# Altium PCB CPU_Board_Updated.PcbDoc
Units mil, origin at the board's own origin, x right, y up, seen from the top; angles counter-clockwise.
Board outline 6000 x 4000 mil, 2 copper layers (Top Layer, Bottom Layer); 101 components, 87 nets, 622 pads, 38 vias.
Unrouted connection lines stored in the file: 149.
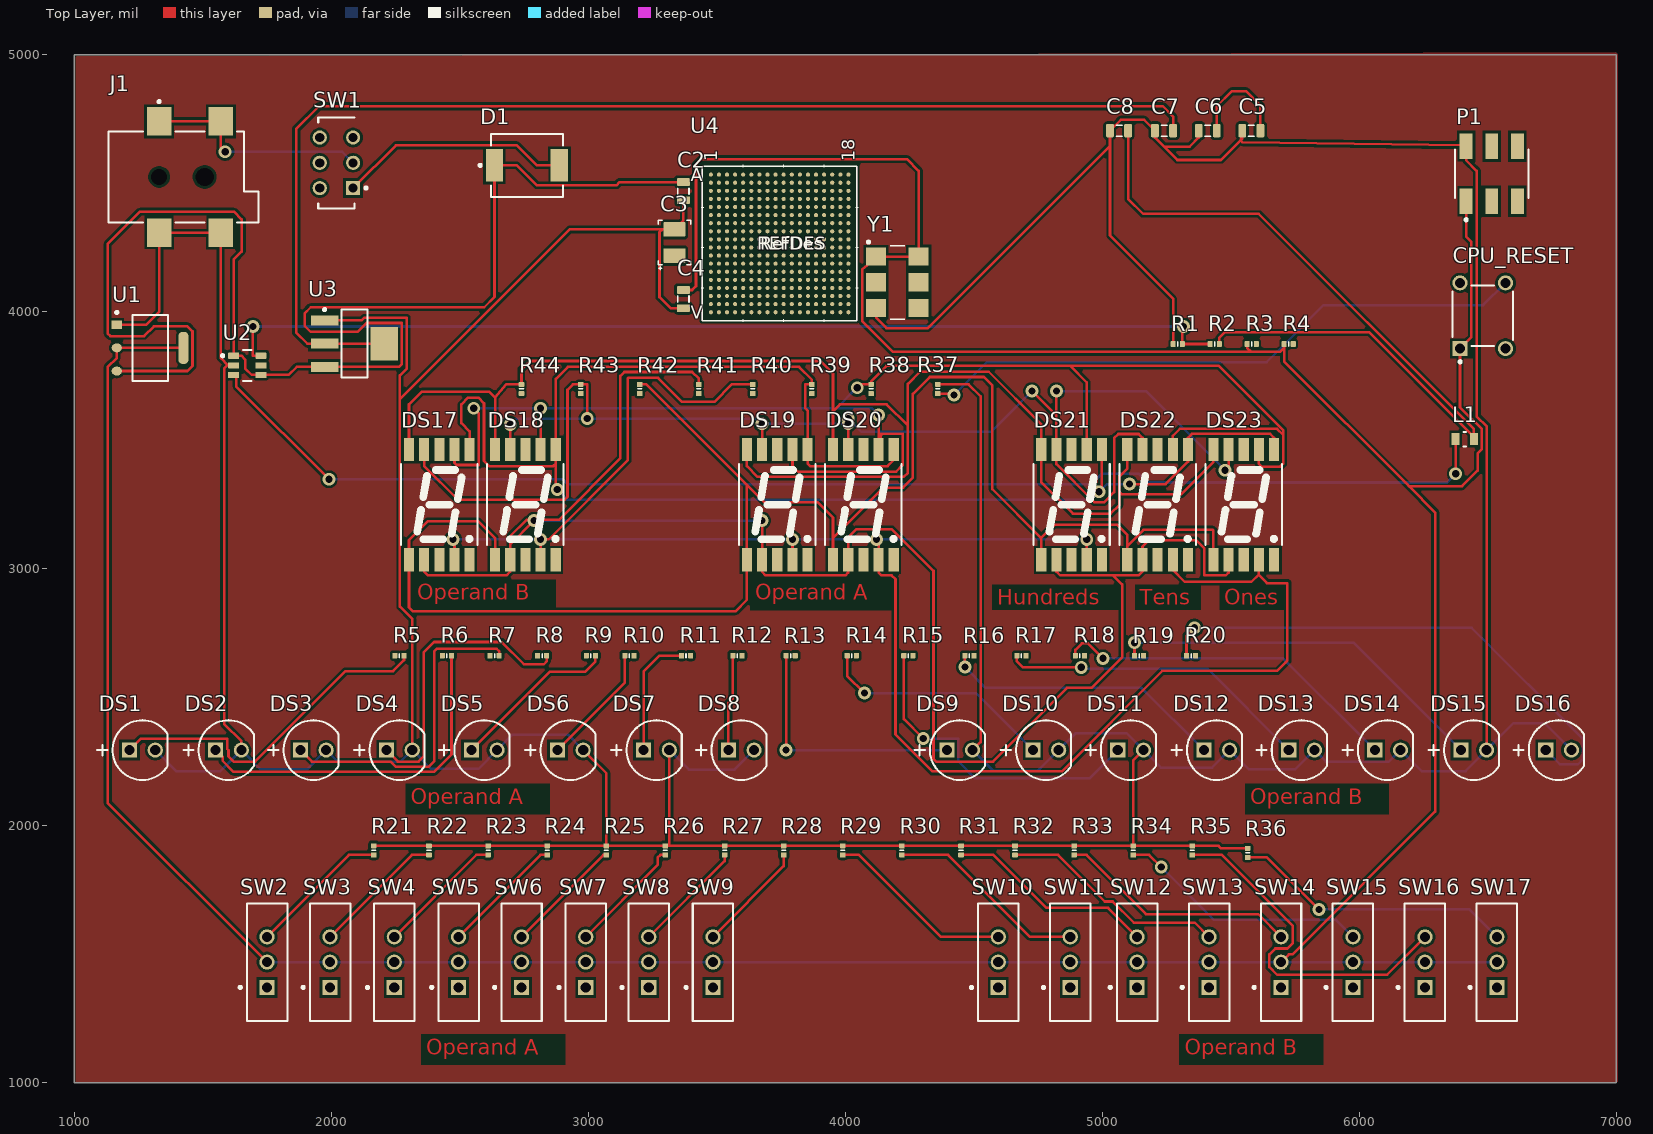
[diagram p0: Top Layer view]
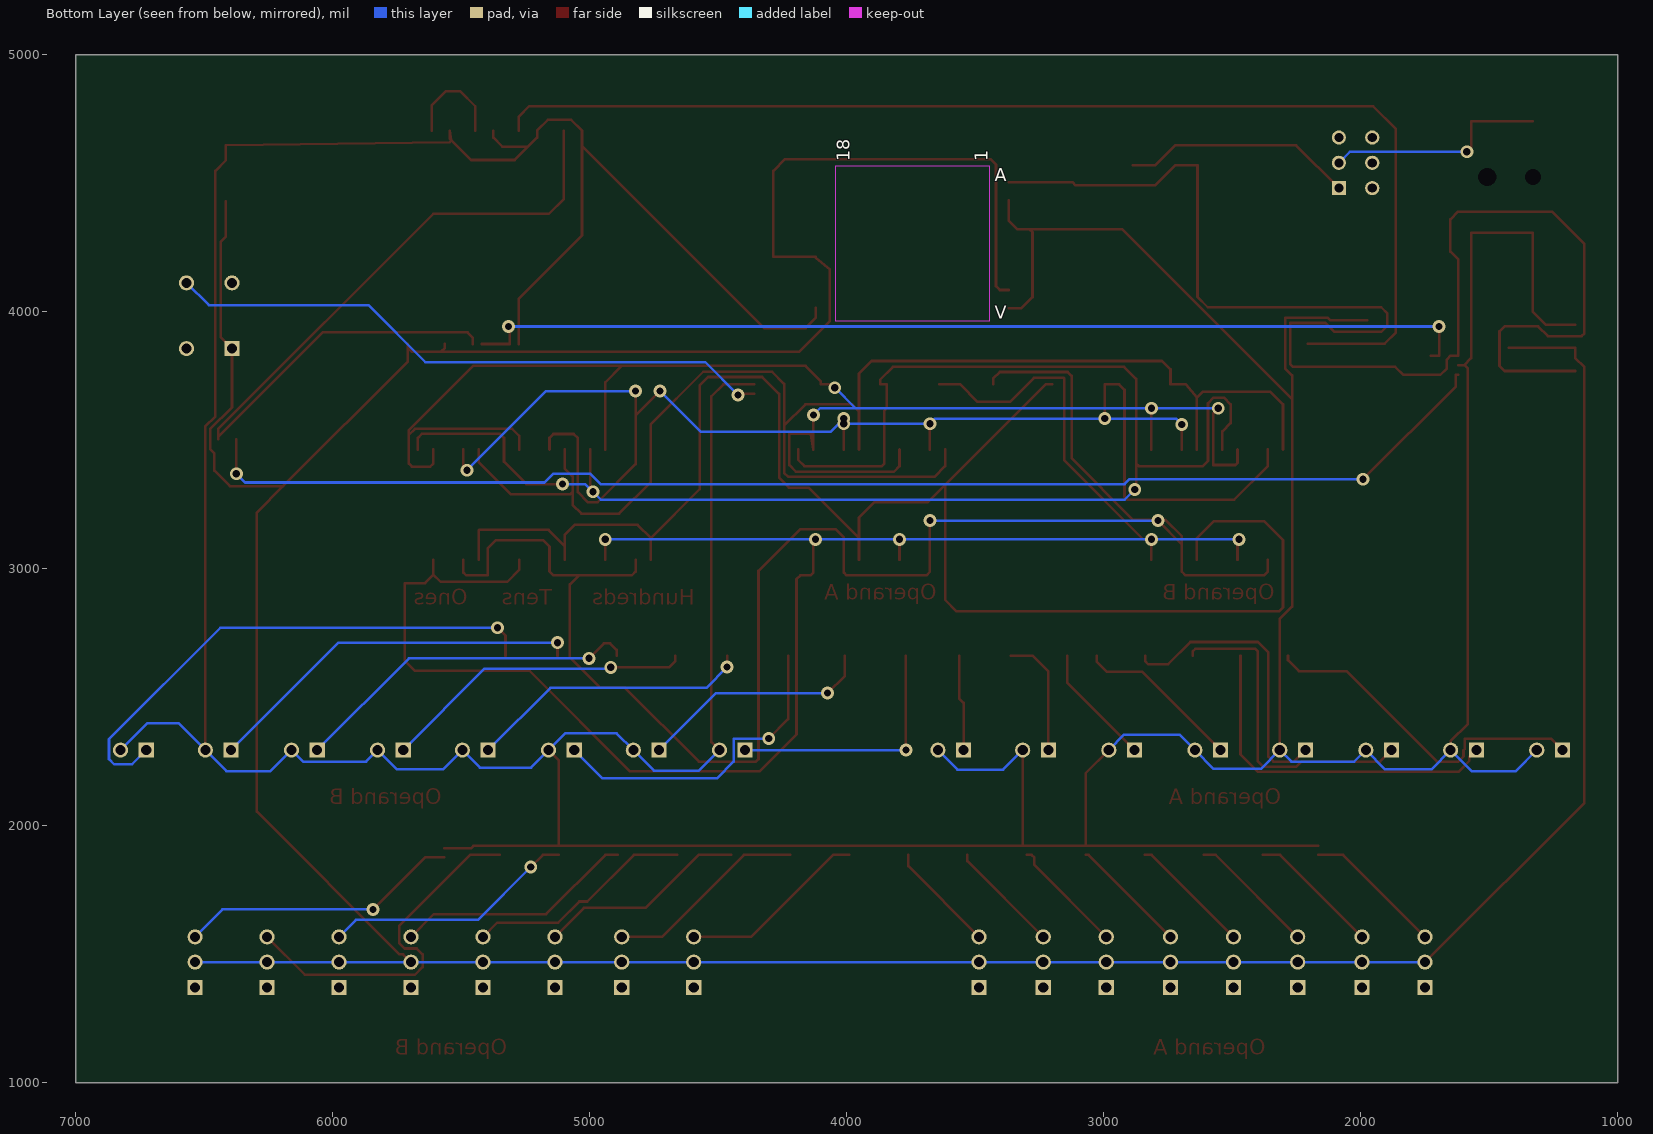
[diagram p1: Bottom Layer view, seen from below]

## Layer stack, top to bottom
Top Solder: solder mask 0.4, Solder Resist, Dk 3.5
Top Layer: signal copper 1.4
Dielectric 1: dielectric 12.6, FR-4, Dk 4.8
Bottom Layer: signal copper 1.4
Bottom Solder: solder mask 0.4, Solder Resist, Dk 3.5

## Board outline
1000,1000 7000,1000 7000,5000 1000,5000

## Design rules (kind name [scope] priority, off if disabled: settings)
Clearance [All] p1: gap=10 ignorepadtopadclearanceinfootprint=FALSE
PolygonConnect [All] p1: connectstyle=Relief reliefconductorwidth=10 reliefentries=4 polygonreliefangle="90 Angle" airgapwidth=10
RoutingVias [All] p1: holewidth=28 width=50 viastyle="Through Hole" minholewidth=28 minwidth=50 maxholewidth=28 maxwidth=50
SolderMaskExpansion [All] p1: expansion=0 istentingtop=FALSE
SupplyNets "Schematic Supply Nets_4" [InNet('+3V3')] p1: voltage=0.000
SupplyNets "Schematic Supply Nets_3" [InNet('+5V')] p2: voltage=0.000
SupplyNets "Schematic Supply Nets_2" [InNet('+1V8')] p3: voltage=0.000
SupplyNets "Schematic Supply Nets_1" [InNet('GND')] p4: voltage=0.000
SupplyNets "Schematic Supply Nets" [InNet('+1V0')] p5: voltage=0.000
Width [All] p1: maxlimit=10 minlimit=10 preferedwidth=10
30 further rules are at their usual default settings.

## Classes and differential pairs
component class Power_Supply: C2 C3 C4 C5 C6 C7 C8 D1 J1 L1 R1 R2 SW1 U1 U2 U3
component class Peripherals: CPU_RESET DS1 DS2 DS3 DS4 DS5 DS6 DS7 DS8 DS9 DS10 DS11 DS12 DS13 DS14 DS15 DS16 DS17 DS18 DS19 DS20 DS21 DS22 DS23 R5 R6 R7 R8 R9 R10 R11 R12 R13 R14 R15 R16 R17 R18 R19 R20 R21 R22 R23 R24 R25 R26 R27 R28 R29 R30 R31 R32 R33 R34 R35 R36 R37 R38 R39 R40 R41 R42 R43 R44 SW2 SW3 SW4 SW5 SW6 SW7 SW8 SW9 SW10 SW11 SW12 SW13 SW14 SW15 SW16 SW17
component class FPGA_Core: P1 R3 R4 U4 Y1

## Components (designator, comment, footprint, x,y, rotation, side; value= is the part's Value field where it differs from the comment)
C2 "Capacitor 10µF +/-20% 25V 0805" CAPC0805(2012)145_L 3370,4470 r90 top value=10µF
C3 "Capacitor 6.8µF +/-20% 35V B2" PNSC-6TPE150MAZB_L 3335,4270 r90 top value=100µF
C4 "Capacitor 10µF +/-20% 25V 0805" CAPC0805(2012)145_L 3370,4050 r90 top value=22µF
C5 "Capacitor 10µF +/-20% 25V 0805" CAPC0805(2012)145_L 5580,4705 r0 top value=10µF
C6 "Capacitor 10µF +/-20% 25V 0805" CAPC0805(2012)145_L 5410,4705 r0 top value=10µF
C7 "Capacitor 10µF +/-20% 25V 0805" CAPC0805(2012)145_L 5240,4705 r0 top value=22µF
C8 "Capacitor 10µF +/-20% 25V 0805" CAPC0805(2012)145_L 5065,4705 r0 top value=10µF
CPU_RESET "B3F-1000" OMRON-B3F-1000-4_V 6480,3985 r90 top
D1 "SS34-E3/9AT" FP-SMC-MFG 2761.18,4570 r0 top
DS1 "UR502DC" CGX-UR502DC 1265,2295 r0 top
DS2 "UR502DC" CGX-UR502DC 1600,2295 r0 top
DS3 "UR502DC" CGX-UR502DC 1930,2295 r0 top
DS4 "UR502DC" CGX-UR502DC 2265,2295 r0 top
DS5 "UR502DC" CGX-UR502DC 2595,2295 r0 top
DS6 "UR502DC" CGX-UR502DC 2930,2295 r0 top
DS7 "UR502DC" CGX-UR502DC 3265,2295 r0 top
DS8 "UR502DC" CGX-UR502DC 3595,2295 r0 top
DS9 "UR502DC" CGX-UR502DC 4445,2295 r0 top
DS10 "UR502DC" CGX-UR502DC 4780,2295 r0 top
DS11 "UR502DC" CGX-UR502DC 5110,2295 r0 top
DS12 "UR502DC" CGX-UR502DC 5445,2295 r0 top
DS13 "UR502DC" CGX-UR502DC 5775,2295 r0 top
DS14 "UR502DC" CGX-UR502DC 6110,2295 r0 top
DS15 "UR502DC" CGX-UR502DC 6445,2295 r0 top
DS16 "UR502DC" CGX-UR502DC 6775,2295 r0 top
DS17 "157112S12800" WL-S7DS_L12W7.3H3.75 2420.24,3250 r0 top
DS18 "157112S12800" WL-S7DS_L12W7.3H3.75 2755.2,3250 r0 top
DS19 "157112S12800" WL-S7DS_L12W7.3H3.75 3735.16,3250 r0 top
DS20 "157112S12800" WL-S7DS_L12W7.3H3.75 4070.12,3250 r0 top
DS21 "157112S12800" WL-S7DS_L12W7.3H3.75 4880.08,3250 r0 top
DS22 "157112S12800" WL-S7DS_L12W7.3H3.75 5215.04,3250 r0 top
DS23 "157112S12800" WL-S7DS_L12W7.3H3.75 5550,3250 r0 top
J1 "PJ-002AH-SMT-TR" CUI-PJ-002AH-4_V 1424.49,4525 r0 top
L1 "MLZ2012A2R2WTD25" FP-MLZ2012-0_85-MFG 6410,3505 r0 top
P1 "95278-101A06LF" AMPM-95278-101A06LF_V 6515,4537.48 r0 top
R1 "Resistor 100K +/-1 % 0402 63 mW" RESC0402(1005)_L 5293.31,3875 r0 top value=150k
R2 "Resistor 100K +/-1 % 0402 63 mW" RESC0402(1005)_L 5437.2,3875 r0 top value=100k
R3 "10KR2F" RESC0402(1005)_L 5581.1,3875 r0 top value=10k
R4 "10KR2F" RESC0402(1005)_L 5725,3875 r0 top value=10k
R5 "Resistor 330R +/-5 % 0402 63 mW" RESC0402(1005)_L 2265,2662.72 r0 top value=330
R6 "Resistor 330R +/-5 % 0402 63 mW" RESC0402(1005)_L 2450,2662.72 r0 top value=330
R7 "Resistor 330R +/-5 % 0402 63 mW" RESC0402(1005)_L 2635,2662.72 r0 top value=330
R8 "Resistor 330R +/-5 % 0402 63 mW" RESC0402(1005)_L 2820,2662.72 r0 top value=330
R9 "Resistor 330R +/-5 % 0402 63 mW" RESC0402(1005)_L 3010,2662.72 r0 top value=330
R10 "Resistor 330R +/-5 % 0402 63 mW" RESC0402(1005)_L 3160,2662.72 r180 top value=330
R11 "Resistor 330R +/-5 % 0402 63 mW" RESC0402(1005)_L 3380,2662.72 r180 top value=330
R12 "Resistor 330R +/-5 % 0402 63 mW" RESC0402(1005)_L 3580,2662.72 r180 top value=330
R13 "Resistor 330R +/-5 % 0402 63 mW" RESC0402(1005)_L 3787.28,2662.72 r180 top value=330
R14 "Resistor 330R +/-5 % 0402 63 mW" RESC0402(1005)_L 4025,2662.72 r180 top value=330
R15 "Resistor 330R +/-5 % 0402 63 mW" RESC0402(1005)_L 4245,2662.72 r180 top value=330
R16 "Resistor 330R +/-5 % 0402 63 mW" RESC0402(1005)_L 4482.72,2662.72 r180 top value=330
R17 "Resistor 330R +/-5 % 0402 63 mW" RESC0402(1005)_L 4685,2662.72 r180 top value=330
R18 "Resistor 330R +/-5 % 0402 63 mW" RESC0402(1005)_L 4912.72,2662.72 r180 top value=330
R19 "Resistor 330R +/-5 % 0402 63 mW" RESC0402(1005)_L 5142.72,2662.72 r180 top value=330
R20 "Resistor 330R +/-5 % 0402 63 mW" RESC0402(1005)_L 5345,2662.72 r180 top value=330
R21 "10KR2F" RESC0402(1005)_L 2165,1905 r90 top value=10k
R22 "10KR2F" RESC0402(1005)_L 2380,1905 r90 top value=10k
R23 "10KR2F" RESC0402(1005)_L 2610,1905 r90 top value=10k
R24 "10KR2F" RESC0402(1005)_L 2840,1905 r90 top value=10k
R25 "10KR2F" RESC0402(1005)_L 3070,1905 r90 top value=10k
R26 "10KR2F" RESC0402(1005)_L 3300,1905 r90 top value=10k
R27 "10KR2F" RESC0402(1005)_L 3530,1905 r90 top value=10k
R28 "10KR2F" RESC0402(1005)_L 3760,1905 r90 top value=10k
R29 "10KR2F" RESC0402(1005)_L 3990,1905 r90 top value=10k
R30 "10KR2F" RESC0402(1005)_L 4220,1905 r90 top value=10k
R31 "10KR2F" RESC0402(1005)_L 4450,1905 r90 top value=10k
R32 "10KR2F" RESC0402(1005)_L 4660,1905 r90 top value=10k
R33 "10KR2F" RESC0402(1005)_L 4890,1905 r90 top value=10k
R34 "10KR2F" RESC0402(1005)_L 5120,1905 r90 top value=10k
R35 "10KR2F" RESC0402(1005)_L 5350,1905 r90 top value=10k
R36 "10KR2F" RESC0402(1005)_L 5565,1895 r90 top value=10k
R37 "10KR2F" RESC0402(1005)_L 4360,3700 r90 top value=10k
R38 "Resistor 330R +/-5 % 0402 63 mW" RESC0402(1005)_L 4100,3700 r90 top value=330
R39 "Resistor 330R +/-5 % 0402 63 mW" RESC0402(1005)_L 3870,3700 r90 top value=330
R40 "Resistor 330R +/-5 % 0402 63 mW" RESC0402(1005)_L 3640,3700 r90 top value=330
R41 "Resistor 330R +/-5 % 0402 63 mW" RESC0402(1005)_L 3430,3700 r90 top value=330
R42 "Resistor 330R +/-5 % 0402 63 mW" RESC0402(1005)_L 3200,3700 r90 top value=330
R43 "Resistor 330R +/-5 % 0402 63 mW" RESC0402(1005)_L 2970,3700 r90 top value=330
R44 "Resistor 330R +/-5 % 0402 63 mW" RESC0402(1005)_L 2740,3700 r90 top value=330
SW1 "JS202011CQN" FP-JS202011CQN-MFG 2020,4580 r90 top
SW2 "EG1218" ESWI-EG1218_V 1750,1470 r90 top
SW3 "EG1218" ESWI-EG1218_V 1995,1470 r90 top
SW4 "EG1218" ESWI-EG1218_V 2245,1470 r90 top
SW5 "EG1218" ESWI-EG1218_V 2495,1470 r90 top
SW6 "EG1218" ESWI-EG1218_V 2740,1470 r90 top
SW7 "EG1218" ESWI-EG1218_V 2990,1470 r90 top
SW8 "EG1218" ESWI-EG1218_V 3235,1470 r90 top
SW9 "EG1218" ESWI-EG1218_V 3485,1470 r90 top
SW10 "EG1218" ESWI-EG1218_V 4595,1470 r90 top
SW11 "EG1218" ESWI-EG1218_V 4875,1470 r90 top
SW12 "EG1218" ESWI-EG1218_V 5135,1470 r90 top
SW13 "EG1218" ESWI-EG1218_V 5415,1470 r90 top
SW14 "EG1218" ESWI-EG1218_V 5695,1470 r90 top
SW15 "EG1218" ESWI-EG1218_V 5975,1470 r90 top
SW16 "EG1218" ESWI-EG1218_V 6255,1470 r90 top
SW17 "EG1218" ESWI-EG1218_V 6535,1470 r90 top
U1 "AMS1117-3.3" FP-AMS1117-IPC_C 1295,3860 r0 top
U2 "TLV62568PDDCT" FP-DDC0006A-MFG 1673.15,3791.99 r0 top
U3 "LD1117S18TR" SOT-223_M 2090,3876.63 r0 top
U4 "XC7A100T-1CSG324C" CSG324_XIL 3744.25,4266.26 r0 top
Y1 "XLH735100.000000X" JU6_MFG 4202.32,4115 r0 top

## Footprints (in the part's own frame and the unit in brackets; to place one, negate y for a bottom-side part, rotate by r counter-clockwise, add the part's x,y. Pads: shape width x height; smd on the part's side, far side on the other; paste and mask are expansions set on the pad)
AMPM-95278-101A06LF_V [mm] "SMD, 6-Leads, Body 7.26x4.83mm, Pitch 2.54mm"
  rect 1.27x2.54 smd: 1(-2.54,-2.73) 2(-2.54,2.73) 3(0,-2.73) 4(0,2.73) 5(2.54,-2.73) 6(2.54,2.73)
  silkscreen extent -3.63,-4.67 3.63,2.42, body extent -3.61,-3.64 3.61,3.64, height 9.71
CAPC0805(2012)145_L [mm] "Chip Capacitor, Body 2.0x1.2mm, Height 1.45mm, IPC High Density"
  rrect25% 0.76x1.3 smd: 1(-0.9,0) 2(0.89,0)
  silkscreen extent -0.3,-0.55 0.3,0.55, body extent -1,-0.6 1,0.6, height 1.45
CGX-UR502DC [mm] "THD, 2-Leads, Dia 5.9mm, Pin Spacing 2.54mm"
  rect 1.5x1.5 hole 1: 1(-1.27,0)
  round 1.5 hole 1: 2(1.27,0)
  silkscreen extent -4.47,-2.95 2.5,2.95, body extent -2.95,-2.95 2.5,2.95, height 9.1
CSG324_XIL [mil]
  round 16 smd paste+0 mask+0: A1(-267.72,267.72) A2(-236.22,267.72) A3(-204.72,267.72) A4(-173.23,267.72) A5(-141.73,267.72) A6(-110.24,267.72) A7(-78.74,267.72) A8(-47.24,267.72) A9(-15.75,267.72) A10(15.75,267.72) A11(47.24,267.72) A12(78.74,267.72) A13(110.24,267.72) A14(141.73,267.72) A15(173.23,267.72) A16(204.72,267.72) A17(236.22,267.72) A18(267.72,267.72) B1(-267.72,236.22) B2(-236.22,236.22) B3(-204.72,236.22) B4(-173.23,236.22) B5(-141.73,236.22) B6(-110.24,236.22) B7(-78.74,236.22) B8(-47.24,236.22) B9(-15.75,236.22) B10(15.75,236.22) B11(47.24,236.22) B12(78.74,236.22) B13(110.24,236.22) B14(141.73,236.22) B15(173.23,236.22) B16(204.72,236.22) B17(236.22,236.22) B18(267.72,236.22) C1(-267.72,204.72) C2(-236.22,204.72) C3(-204.72,204.72) C4(-173.23,204.72) C5(-141.73,204.72) C6(-110.24,204.72) C7(-78.74,204.72) C8(-47.24,204.72) C9(-15.75,204.72) C10(15.75,204.72) C11(47.24,204.72) C12(78.74,204.72) C13(110.24,204.72) C14(141.73,204.72) C15(173.23,204.72) C16(204.72,204.72) C17(236.22,204.72) C18(267.72,204.72) D1(-267.72,173.23) D2(-236.22,173.23) D3(-204.72,173.23) D4(-173.23,173.23) D5(-141.73,173.23) D6(-110.24,173.23) D7(-78.74,173.23) D8(-47.24,173.23) D9(-15.75,173.23) D10(15.75,173.23) D11(47.24,173.23) D12(78.74,173.23) D13(110.24,173.23) D14(141.73,173.23) D15(173.23,173.23) D16(204.72,173.23) D17(236.22,173.23) D18(267.72,173.23) E1(-267.72,141.73) E2(-236.22,141.73) E3(-204.72,141.73) E4(-173.23,141.73) E5(-141.73,141.73) E6(-110.24,141.73) E7(-78.74,141.73) E8(-47.24,141.73) E9(-15.75,141.73) E10(15.75,141.73) E11(47.24,141.73) E12(78.74,141.73) E13(110.24,141.73) E14(141.73,141.73) E15(173.23,141.73) E16(204.72,141.73) E17(236.22,141.73) E18(267.72,141.73) F1(-267.72,110.24) F2(-236.22,110.24) F3(-204.72,110.24) F4(-173.23,110.24) F5(-141.73,110.24) F6(-110.24,110.24) F7(-78.74,110.24) F8(-47.24,110.24) F9(-15.75,110.24) F10(15.75,110.24) F11(47.24,110.24) F12(78.74,110.24) F13(110.24,110.24) F14(141.73,110.24) F15(173.23,110.24) F16(204.72,110.24) F17(236.22,110.24) F18(267.72,110.24) G1(-267.72,78.74) G2(-236.22,78.74) G3(-204.72,78.74) G4(-173.23,78.74) G5(-141.73,78.74) G6(-110.24,78.74) G7(-78.74,78.74) G8(-47.24,78.74) G9(-15.75,78.74) G10(15.75,78.74) G11(47.24,78.74) G12(78.74,78.74) G13(110.24,78.74) G14(141.73,78.74) G15(173.23,78.74) G16(204.72,78.74) G17(236.22,78.74) G18(267.72,78.74) H1(-267.72,47.24) H2(-236.22,47.24) H3(-204.72,47.24) H4(-173.23,47.24) H5(-141.73,47.24) H6(-110.24,47.24) H7(-78.74,47.24) H8(-47.24,47.24) H9(-15.75,47.24) H10(15.75,47.24) H11(47.24,47.24) H12(78.74,47.24) H13(110.24,47.24) H14(141.73,47.24) H15(173.23,47.24) H16(204.72,47.24) H17(236.22,47.24) H18(267.72,47.24) J1(-267.72,15.75) J2(-236.22,15.75) J3(-204.72,15.75) J4(-173.23,15.75) J5(-141.73,15.75) J6(-110.24,15.75) J7(-78.74,15.75) J8(-47.24,15.75) J9(-15.75,15.75) J10(15.75,15.75) J11(47.24,15.75) J12(78.74,15.75) J13(110.24,15.75) J14(141.73,15.75) J15(173.23,15.75) J16(204.72,15.75) J17(236.22,15.75) J18(267.72,15.75) K1(-267.72,-15.75) K2(-236.22,-15.75) K3(-204.72,-15.75) K4(-173.23,-15.75) K5(-141.73,-15.75) K6(-110.24,-15.75) K7(-78.74,-15.75) K8(-47.24,-15.75) K9(-15.75,-15.75) K10(15.75,-15.75) K11(47.24,-15.75) K12(78.74,-15.75) K13(110.24,-15.75) K14(141.73,-15.75) K15(173.23,-15.75) K16(204.72,-15.75) K17(236.22,-15.75) K18(267.72,-15.75) L1(-267.72,-47.24) L2(-236.22,-47.24) L3(-204.72,-47.24) L4(-173.23,-47.24) L5(-141.73,-47.24) L6(-110.24,-47.24) L7(-78.74,-47.24) L8(-47.24,-47.24) L9(-15.75,-47.24) L10(15.75,-47.24) L11(47.24,-47.24) L12(78.74,-47.24) L13(110.24,-47.24) L14(141.73,-47.24) L15(173.23,-47.24) L16(204.72,-47.24) L17(236.22,-47.24) L18(267.72,-47.24) M1(-267.72,-78.74) M2(-236.22,-78.74) M3(-204.72,-78.74) M4(-173.23,-78.74) M5(-141.73,-78.74) M6(-110.24,-78.74) M7(-78.74,-78.74) M8(-47.24,-78.74) M9(-15.75,-78.74) M10(15.75,-78.74) M11(47.24,-78.74) M12(78.74,-78.74) M13(110.24,-78.74) M14(141.73,-78.74) M15(173.23,-78.74) M16(204.72,-78.74) M17(236.22,-78.74) M18(267.72,-78.74) N1(-267.72,-110.24) N2(-236.22,-110.24) N3(-204.72,-110.24) N4(-173.23,-110.24) N5(-141.73,-110.24) N6(-110.24,-110.24) N7(-78.74,-110.24) N8(-47.24,-110.24) N9(-15.75,-110.24) N10(15.75,-110.24) N11(47.24,-110.24) N12(78.74,-110.24) N13(110.24,-110.24) N14(141.73,-110.24) N15(173.23,-110.24) N16(204.72,-110.24) N17(236.22,-110.24) N18(267.72,-110.24) P1(-267.72,-141.73) P2(-236.22,-141.73) P3(-204.72,-141.73) P4(-173.23,-141.73) P5(-141.73,-141.73) P6(-110.24,-141.73) P7(-78.74,-141.73) P8(-47.24,-141.73) P9(-15.75,-141.73) P10(15.75,-141.73) P11(47.24,-141.73) P12(78.74,-141.73) P13(110.24,-141.73) P14(141.73,-141.73) P15(173.23,-141.73) P16(204.72,-141.73) P17(236.22,-141.73) P18(267.72,-141.73) R1(-267.72,-173.23) R2(-236.22,-173.23) R3(-204.72,-173.23) R4(-173.23,-173.23) R5(-141.73,-173.23) R6(-110.24,-173.23) R7(-78.74,-173.23) R8(-47.24,-173.23) R9(-15.75,-173.23) R10(15.75,-173.23) R11(47.24,-173.23) R12(78.74,-173.23) R13(110.24,-173.23) R14(141.73,-173.23) R15(173.23,-173.23) R16(204.72,-173.23) R17(236.22,-173.23) R18(267.72,-173.23) T1(-267.72,-204.72) T2(-236.22,-204.72) T3(-204.72,-204.72) T4(-173.23,-204.72) T5(-141.73,-204.72) T6(-110.24,-204.72) T7(-78.74,-204.72) T8(-47.24,-204.72) T9(-15.75,-204.72) T10(15.75,-204.72) T11(47.24,-204.72) T12(78.74,-204.72) T13(110.24,-204.72) T14(141.73,-204.72) T15(173.23,-204.72) T16(204.72,-204.72) T17(236.22,-204.72) T18(267.72,-204.72) U1(-267.72,-236.22) U2(-236.22,-236.22) U3(-204.72,-236.22) U4(-173.23,-236.22) U5(-141.73,-236.22) U6(-110.24,-236.22) U7(-78.74,-236.22) U8(-47.24,-236.22) U9(-15.75,-236.22) U10(15.75,-236.22) U11(47.24,-236.22) U12(78.74,-236.22) U13(110.24,-236.22) U14(141.73,-236.22) U15(173.23,-236.22) U16(204.72,-236.22) U17(236.22,-236.22) U18(267.72,-236.22) V1(-267.72,-267.72) V2(-236.22,-267.72) V3(-204.72,-267.72) V4(-173.23,-267.72) V5(-141.73,-267.72) V6(-110.24,-267.72) V7(-78.74,-267.72) V8(-47.24,-267.72) V9(-15.75,-267.72) V10(15.75,-267.72) V11(47.24,-267.72) V12(78.74,-267.72) V13(110.24,-267.72) V14(141.73,-267.72) V15(173.23,-267.72) V16(204.72,-267.72) V17(236.22,-267.72) V18(267.72,-267.72)
  Keep-Out Layer region: -300.96,-300.96 -300.96,300.96 300.96,300.96 300.96,-300.96
  silkscreen extent -306,-305 306,306, body extent -296,-296 296,296, height 59
CUI-PJ-002AH-4_V [mm] "SMD, 4-Leads, Body 14.8x9 mm, Pitch 6.1mm"
  rect 2.4x2.8 smd: 1(-2.4,5.5) 1(3.7,5.5) 2(-2.4,-5.5) 3(3.7,-5.5)
  round 0 hole 1.6: MH1(-2.4,0)
  round 0 hole 1.8: MH2(2.1,0)
  silkscreen extent -7.4,-4.5 7.4,7.57, body extent -7.4,-6.3 7.4,6.3, height 11.2
ESWI-EG1218_V [mm] "THD, 3-Leads, Body 11.6x4mm, Pitch 2.5mm"
  rect 1.5x1.5 hole 1: 1(-2.5,0)
  round 1.5 hole 1: 2(0,0) 3(2.5,0)
  silkscreen extent -5.8,-2 5.8,2.77, body extent -5.8,-2 5.8,2, height 7.4
FP-AMS1117-IPC_C [mm]
  rect 1.004x0.872 smd paste+0 mask+0: 1(-3.295,2.29)
  rrect100% 1.004x0.872 smd paste+0 mask+0: 2(-3.295,0) 3(-3.295,-2.29)
  rrect87% 1.004x3.182 smd paste+0 mask+0: 4(3.295,0)
  silkscreen extent -3.42,-3.25 1.75,3.62, body extent -3.9,-3.35 3.9,3.35, height 0.25
FP-DDC0006A-MFG [mm]
  rrect17% 1.1x0.6 smd paste+0 mask+0: 1(-1.35,0.95) 2(-1.35,0) 3(-1.35,-0.95) 4(1.35,-0.95) 5(1.35,0) 6(1.35,0.95)
  silkscreen extent -2.57,-1.53 0.43,1.53, body extent -2,-1.63 2,1.63, height 0.25
FP-JS202011CQN-MFG [mm]
  rect 1.4x1.4 hole 0.9 paste-2539.97 mask+0: 1(-2.5,-1.65)
  round 1.4 hole 0.9 paste-2539.97 mask+0: 2(0,-1.65) 3(2.5,-1.65) 4(2.5,1.65) 5(0,1.65) 6(-2.5,1.65)
  silkscreen extent -4.5,-3.05 4.5,1.8, body extent -4.6,-2.45 4.6,2.45, height 0.25
FP-MLZ2012-0_85-MFG [mm]
  rect 0.8x1.2 smd paste+0 mask+0: 1(-0.9,0) 2(0.9,0)
  silkscreen extent -0.13,-0.73 0.13,0.73, body extent -1.4,-0.82 1.4,0.82, height 0.25
FP-SMC-MFG [mm]
  rect 1.72x3.2 smd paste+0 mask+0: 1(-3.205,0) 2(3.205,0)
  silkscreen extent -4.75,-3.11 3.56,3.11, body extent -4.17,-3.21 4.17,3.21, height 0.25
JU6_MFG [mm] "Recommended Land Pattern"
  rect 2x1.8 smd paste+0 mask+0: 1(-2.1,2.54) 2(-2.1,0) 3(-2.1,-2.54) 4(2.1,-2.54) 5(2.1,0) 6(2.1,2.54)
  silkscreen extent -2.97,-3.64 0.72,4.09, body extent -2.5,-3.5 2.5,3.5, height 1.45
OMRON-B3F-1000-4_V [mm] "TH, 4-Leads, Body 6x6mm"
  rect 1.5x1.5 hole 1 paste-2539.97: 1(-3.25,2.25)
  round 1.5 hole 1 paste-2539.97: 2(3.25,2.25) 4(3.25,-2.25)
  round 1.5 hole 1 paste-2539.97 mask+0.102: 3(-3.25,-2.25)
  silkscreen extent -4.67,-3 3,3, body extent -3,-3 3,3, height 4.5
PNSC-6TPE150MAZB_L [mm] "Molded Capacitor, 2-Leads, Body 3.70x3mm, IPC High Density"
  rrect10% 1.45x2.15 smd: 1(-1.3,0) 2(1.3,0)
  silkscreen extent -2.7,-1.6 2.2,1.6, body extent -2.07,-1.5 2.07,1.5, height 2
RESC0402(1005)_L [mm] "Chip Resistor, Body 1.0x0.5mm, IPC High Density"
  rrect25% 0.5x0.55 smd: 1(-0.45,0) 2(0.45,0)
  silkscreen extent 0,-0.2 0,0.2, body extent -0.5,-0.25 0.5,0.25, height 0.3
SOT-223_M [mm] "SOT223, 4-Leads, Body 6.5x3.5mm, Pitch 2.3mm, Lead Span 7mm, IPC Low Density"
  rect 2.7x1 smd: 1(-2.95,2.3) 2(-2.95,0) 3(-2.95,-2.3)
  rect 2.7x3.3 smd: 4(2.95,0)
  silkscreen extent -3.07,-3.35 1.3,3.47, body extent -1.85,-3.35 1.85,3.35, height 1.8
WL-S7DS_L12W7.3H3.75 [mm] "7 Segments Display SMT Single Digit, body 12x7.3mm"
  rect 1x2.3 smd: 1(-3,-5.45) 2(-1.5,-5.45) 3(0,-5.45) 4(1.5,-5.45) 5(3,-5.45) 6(3,5.45) 7(1.5,5.45) 8(0,5.45) 9(-1.5,5.45) 10(-3,5.45)
  silkscreen extent -3.77,-4 3.78,4, body extent -3.65,-6 3.65,6, height 3.85

## Part data
C2 C4 C5 C6 C7 C8: library part CMP-001-00079-4, "Chip Capacitor, 10µF +/-20%, 25V, 0805, Thickness 1.45 mm", Case/Package=0805, Max Operating Temperature=85°C, Min Operating Temperature=-55°C, Tolerance=10%, Voltage Rating=25V, Mounting Technology=SMT, Pins=2
C3: library part CMP-001-00059-3, "Molded Tantalum Polymer Capacitor, 6.8 uF, +/- 20%, 35 V, -55 to 105 degC, 2-Pin SMD, RoHS, Tape and Reel", Case/Package=1210, Max Operating Temperature=105°C, Min Operating Temperature=-55°C, Tolerance=20%, Voltage Rating=35V, Mounting Technology=SMT, Pins=2
CPU_RESET: library part CMP-1677-00002-1, "Tactile Switch, SPST-NO, 0.05 A, 5 to 24 V, -25 to 70 degC, 4-Pin THD, RoHS, Bulk", Capacitance="-45 f", Current Rating="1.5 A", Max Operating Temperature="70 degC", Min Operating Temperature="-40 degC", Package Quantity=1080, Voltage Rating="150 V", ComponentLink1Description="Manufacturer URL", ComponentLink1URL=http://www.omron.com/, ComponentLink2Description=Datasheet, ComponentLink2URL=http://www.omron.com/ecb/products/pdf/en-b3f.pdf, Contact Material=Brass, Contact Plating=Gold, DatasheetVersion=Jan-15, Gender=Female, Height="14.99 mm", Lead Pitch="1.27 mm", Length="18.34 mm", Mount="Through Hole", PackageDescription="4-Pin Through Hole Device, Body 6 x 6 mm", PackageReference=B3F-1000, Packaging=Tray, Pins=8, Radiation Hardening=No, RoHSCompliant=true, Shielding=Shielded, Width="25.4 mm"
D1: library part CMP-02539-000066-1, "DIODE SCHOTTKY 40V 3A DO214AB", Average Rectified Current=3A, Case/Package=SMC, Forward Voltage=500mV, Max Operating Temperature=125°C, Max Repetitive Reverse Voltage (Vrrm)=40V, Max Reverse Current=500uA, Max Surge Current=100A, Min Operating Temperature=-55°C, Package Quantity=3500, Element Configuration=Single, Forward Current=3A, Max Reverse Leakage Current=500uA, Max Reverse Voltage (DC)=40V, Mount="Surface Mount", Number of Pins=2, Packaging="Tape and Reel", Peak Non-Repetitive Surge Current=100A, Radiation Hardening=No, RoHS Compliant=Yes, Series=-
DS1 DS2 DS3 DS4 DS5 DS6 DS7 DS8 DS9 DS10 DS11 DS12 DS13 DS14 DS15 DS16: library part CMP-007-00009-2, "Red LED, 80 mW, 30 mA, -25 to 85 degC, 2-Pin THD", Manufacturer="Shenzhen CGX", Package Description="2-Pin Through Hole Device, Dia 5.9 mm, Height 9.1 mm", Power=80mW, Case/Package=UR502DC, Datasheet URL=http://datasheet.octopart.com/UR502DC-Chengguangxing-datasheet-62330342.pdf, Datasheet Version=Sep-14, Manufacturer URL=http://szcgx.com/, Mounting Technology=TH, Package Reference=UR502DC, RoHS Compliant=Unknown
DS17 DS18 DS19 DS20 DS21 DS22 DS23: library part CMP-03913-119893987-3, "7-Seg Display, Comm Anode, Super Red Rohs Compliant: Yes", Forward Current=100mA, Forward Voltage=2V, Max Operating Temperature=85°C, Max Reverse Voltage (DC)=5V, Min Operating Temperature=-35°C, Dominant Wavelength=635nm, Height=3.75mm, Length=12mm, Luminous Intensity=15mcd, RoHS=Compliant, Width=7.3mm
J1: library part CMP-2000-06896-2, "DC Power Jack, Right Angle, -25 to 85 degC, 4-Pin 14.8 x 9 x 11 mm SMD, RoHS, Tape and Reel", Current Rating=5A, Flammability Rating=UL94V-0, Insulation Resistance=100MOhms, Manufacturer=CUIInc., Operating Temperature Range=-25Cto+85C, Package Description="4-Pin Surface Mount Device, Body 14.8 x 9 mm, Pitch 6.1 mm", Package Reference=PJ-002AH, Voltage Rating=24V, Brand=CUI, Connector Type=DCPowerJack, Contact Gender=Male, Contact Material=Brass, Contact Plating=Nickel, Datasheet URL=http://www.cui.com/product/resource/pj-002ah-smt.pdf, Datasheet Version="Rev. 1.03, 11/2012", Factory Pack Quantity=350, Housing Material=Polyamide(PA), Inside Contact Diameter=2mm, Manufacturer URL=http://www.cui.com/, Mounting Angle=Right, Mounting Style=SMD/SMT, Mounting Technology=SurfaceMount, Outside Contact Diameter=6.5mm, Packaging=Reel, PartNumber=PJ-002AH, Product=Jacks, Product Category=DCPowerConnectors, RoHS=True, Termination Style=SMD/SMT
L1: library part CMP-08253-000205-1, "Shielded Multilayer Inductor 2.2uH ±20% 650mA 195mΩ AEC-Q200 SMD 0805", Case Code (Imperial)=0805, Case Code (Metric)=2012, Current Rating=650mA, DC Resistance (DCR)=195mR, Inductance=2.2uH, Max Operating Temperature=125°C, Min Operating Temperature=-55°C, Package Quantity=4000, Ratings=AEC-Q200, Resistance=0.26R, Saturation Current=210mA, Test Frequency=10MHz, Tolerance=20%, Case/Package=0805, Core Material=Ferrite, Height=0.85mm, Height - Seated (Max)=0.041inch, Length=0.079inch, Max DC Current=650mA, Mount="Surface Mount", Packaging="Tape and Reel", RoHS Compliant=Yes, Shielding=Shielded, Termination=SMD/SMT, Weight=0.000194oz, Width=1.25mm
P1: library part CMP-002-00024-2, "Male Header, Pitch 2.54 mm, 2 x 3 Position, Height 14.4 mm, RoHS, Tape and Reel", Manufacturer=Amphenol, Package Description="Male Header, Pitch 2.54 mm, 2 x 3 Position, Height 14.4 mm", Case/Package=95278-101A06LF, Connector Type=Header, Datasheet URL=http://portal.fciconnect.com/Comergent//fci/drawing/95278.pdf, Datasheet Version="Rev. AC, 03/2016", Gender=Male, Mounting Technology=SM, Package Reference=95278-101A06LF, RoHS Compliant=Unknown
R1 R2: library part CMP-009-00168-3, "Chip Resistor, 100 kOhms, +/-1 %, 63 mW, -55 to 155 degC, 0402", Case/Package=0402, Max Operating Temperature=155°C, Min Operating Temperature=-55°C, Power=63mW, Tolerance=1%, Pins=2
R3 R4 R21 R22 R23 R24 R25 R26 R27 R28 R29 R30 R31 R32 R33 R34 R35 R36 R37: library part CMP-009-00066-2, "10K 0.063W 1% 0402 (1005 Metric)  SMD", Case/Package=0402, Power=63mW, Tolerance=1%, Mounting Technology=SMT, Pins=2
R5 R6 R7 R8 R9 R10 R11 R12 R13 R14 R15 R16 R17 R18 R19 R20 R38 R39 R40 R41 R42 R43 R44: library part CMP-009-00132-3, "Chip Resistor, 330 Ohms, +/-5 %, 63 mW, -55 to 155 degC, 0402", Case/Package=0402, Max Operating Temperature=155°C, Min Operating Temperature=-55°C, Power=63mW, Tolerance=5%, Pins=2
SW1: library part CMP-10038-000022-1, "SWITCH SLIDE DPDT 300MA 6V", Actuator Color=Black, Contact Current Rating=100mA, Contact Resistance=70mR, Current Rating=300mA, Flammability Rating="UL94 V-0", Max Operating Temperature=85°C, Max Voltage Rating (DC)=6V, Min Operating Temperature=-40°C, Package Quantity=1, Actuator Length=2mm, Actuator Material=Nylon, Actuator Type=Standard, Contact Material="Copper Alloy", Contact Plating=Silver, Depth=3.6mm, Electrical Life=5000Cycles, Housing Material=Nylon, Illumination Type=Non-Illuminated, Lead Free="Lead Free", Length=9mm, Max Current Rating=300mA, Mount="Through Hole", Orientation=Vertical, Packaging=Bulk, Radiation Hardening=No, REACH SVHC="No SVHC", RoHS Compliant=Yes, Series=JS, Switch Function=On-On, Switch Travel=2mm, Termination="PC Pins", Throw Configuration=DPDT, Voltage Rating (DC)=6V
SW2 SW3 SW4 SW5 SW6 SW7 SW8 SW9 SW10 SW11 SW12 SW13 SW14 SW15 SW16 SW17: library part CMP-011-00006-2, "Slide Switch, SPDT, 500 V, -20 to 70 degC, 3-Pin THD, RoHS, Bulk", Contact Current Rating=200mA, Manufacturer=E-Switch, Max Operating Temperature=70°C, Min Operating Temperature=-20°C, Operating Force=250gf, Package Description="3-Pin Through Hole Device, Body 11.6 x 4 mm, Pitch 2.5 mm", Package Quantity=1000, Voltage Rating (AC)=30V, Case/Package=EG1218, Contact Finish=Silver, Contact Material=Copper, Contact Plating=Silver, Current Rating=200mA, Datasheet URL=https://www.e-switch.com/system/asset/product_line/data_sheet/119/EG.pdf, Datasheet Version=Oct-15, Manufacturer URL=http://www.e-switch.ch/en/, Mounting Technology=TH, Package Reference=EG1218, Packaging=Bulk, Pins=3, RoHS Compliant=True, Throw Configuration=SPDT, Voltage Rating (DC)=30V
U1: library part CMP-209535-000001-1, "LDO Voltage Regulators 1A, 3.3V", Dropout Voltage=1.1V, Manufacturer="Advanced Monolithic Systems", Max Junction Temp=+125°C, Max Power Dissipation=1.2W, Max Supply Voltage=15V, Nominal Supply Current=5mA, Output Current=1A, Output Voltage=3.3V, Package=AMS1117, Temperature="-40°C to +125°C", Temperature Range Low=-40°C, Automotive=No, Category=IC, ComponentLink2Description=Datasheet, ComponentLink2URL=http://www.advanced-monolithic.com/pdf/ds1117.pdf, Device Class L1="Integrated Circuits (ICs)", Device Class L2="Power Management ICs", Device Class L3="Voltage Regulators - Linear", Height=1.8mm, Ipc Land Pattern Name=SOT229P700X180-4, Lead Free=Yes, Manufacturer Part Number=AMS1117-3.3, Number Of Outputs=1, Octopart=https://octopart.com/ams1117-3.3-advanced+monolithic+systems-25899300, Output Type=Fixed, RoHS=TRUE, Standoff Height=0.64mm, Temperature Range High=+125°C
U2: library part CMP-04918-000671-1, "IC REG BUCK ADJ 1A TSOT23-6", Case/Package=SOT-23-6, Max Input Voltage=5.5V, Max Operating Temperature=125°C, Min Input Voltage=2.5V, Min Operating Temperature=-40°C, Min Output Voltage=600mV, Output Current=1A, Switching Frequency=1.5MHz, Max Output Voltage=5.5V, Mount="Surface Mount", Number Of Outputs=1, Output Configuration=Positive, Output Type=Adjustable, Packaging="Cut Tape", RoHS Compliant=Yes, Synchronous Rectifier=Yes
U3: library part CMP-0244-00308-1, "Fixed Low Drop Positive Voltage Regulator, 1.8V, 4-Pin SOT-223, Tape and Reel", ComponentLink1Description="Manufacturer URL", ComponentLink1URL=http://www.st.com, ComponentLink2Description=Datasheet, ComponentLink2URL=http://www.st.com/internet/com/TECHNICAL_RESOURCES/TECHNICAL_LITERATURE/DATASHEET/CD00000544.pdf, DatasheetVersion=1/11/2011, PackageDescription="4-Pin SOT-223 Package, 6.5 x 3.5 mm Body, 2.3 mm Pitch, 7 mm Lead Span", PackageReference=SOT-223, PackageVersion=2010
U4: "Description", Manufacturer_Name="Xilinx Inc", Copyright="Copyright (C) 2025 Ultra Librarian. All rights reserved.", Manufacturer_Part_Number=XC7A100T-1CSG324C, RefDes=RefDes, Type=Type
Y1: library part CMP-00572-106941302-3, "Crystal ROHS3Compliant Enable/Disable Active Oscillator -20C~70C 47mA 0.055 1.40mm 100MHz", Case/Package=CLCC, Max Input Voltage=3.465V, Max Operating Temperature=70°C, Max Output Frequency=999.9MHz, Min Input Voltage=3.135V, Min Operating Temperature=-20°C, ComponentLink1Description="Manufacturer's Website", ComponentLink1URL=http://www.renesas.com, ComponentLink2Description="Datasheet URL", ComponentLink2URL=https://octopart.com/cad-content/api/get-model-datasheet/15189/106941302, ComponentLink3Description="Manufacturer's Package Drawing", ComponentLink3URL=https://www.renesas.com/en/document/psc/ju6-package-outline-70-x-50-mm-body-13-mm-thick, Height=1.45mm, HelpURL=https://octopart.com/cad-content/api/get-model-datasheet/15189/106941302, Mount="Surface Mount", Number of Pins=6, Output Type=LVCMOS, RoHS=Compliant

## Via types
v1: diameter 50, hole 28, Top Layer to Bottom Layer, 38 vias

## Nets (pads, with @x,y where several pads share a name; then routed paths per layer and width w, separated by ;. In a path a pad name is that pad's centre, name@x,y a point inside that pad or via, vN(x,y) a via of type N, cw(c..) or ccw(c..) an arc to the next point about the centre after c; other vN are vias at no path point)
"  SW_0": R21.1 SW2.3 U4.J15 | length 547.1
  Top Layer w10: SW2.3 2068.86,1887.28 R21.1
"  SW_2": R23.1 SW4.3 U4.M13 | length 497.1
  Top Layer w10: SW4.3 2563.86,1887.28 R23.1
"  SW_4": R25.1 SW6.3 U4.R17 | length 462.1
  Top Layer w10: SW6.3 3058.86,1887.28 R25.1
"  SW_6": R27.1 SW8.3 U4.U18 | length 441.1
  Top Layer w10: SW8.3 3530,1863.43 R27.1
"  SW_8": R29.1 SW10.3 U4.T8 | length 737.1
  Top Layer w10: R29.1 4052.72,1887.28 4371.57,1568.43 SW10.3
"  SW_10": R31.1 SW12.3 U4.R16 | length 817.1
  Top Layer w10: R31.1 4575.72,1887.28 4782,1681 5022.43,1681 SW12.3
"  SW_12": R33.1 SW14.3 U4.H6 | length 937.1
  Top Layer w10: R33.1 4939,1887.28 5169.28,1657 5606.43,1657 SW14.3
"  SW_14": R35.1 SW16.3 U4.U11 | length 1408.3
  Top Layer w10: R35.1 5464.72,1887.28 5740,1612 5740,1543 5720,1523 5673,1523 5650,1500 5650,1451 5680,1421 6107.57,1421 SW16.3
+1V0: C8.2 L1.2 R2.2 U4.F8 U4.F10 U4.G7 U4.G9 U4.G11 U4.H8 U4.J7 U4.J11 U4.K8 U4.L7 U4.L11 U4.M8 U4.M10 U4.N7 U4.N9 U4.N11 | length 3212.9
  Top Layer w10: C8.2 5100.04,4440 5159.04,4381 5608.43,4381 6445.43,3544 L1.2@6445.43,3513 ; R2.2 5454.92,3900 5474.92,3920 6038.43,3920 L1.2@6445.43,3513 ; L1.2 L1.2@6445.43,3513
+1V8: C7.2 U3.2 U3.4 U4.F12 U4.H10 U4.H12 U4.K12 U4.M12 | length 4672.6
  Top Layer w10: U3.4 U3.2 1906.37,3876.63 1863,3920 1863,4711 1952,4800 5235.04,4800 5275.04,4760 C7.2
+3V3: C4.2 CPU_RESET.1 P1.1 R3.1 R4.1 SW2.2 SW3.2 SW4.2 SW5.2 SW6.2 SW7.2 SW8.2 SW9.2 SW10.2 SW11.2 SW12.2 SW13.2 SW14.2 SW15.2 SW16.2 SW17.2 U1.2 U1.4 U4.A7 U4.A17 U4.C3 U4.C13 U4.D6 U4.D16 U4.F2 U4.G5 U4.G15 U4.H18 U4.J1 U4.K4 U4.K14 U4.L17 U4.N3 U4.N13 U4.P6 U4.P8 U4.P16 U4.T2 U4.T12 U4.U5 U4.U15 U4.V8 U4.V18 Y1.1 Y1.6 | length 15952.7
  Top Layer w10: U1.4 U1.2 1165.28,3820 1130,3784.72 1130,2090 SW2.2 ; C4.2 3404.04,4085.04 3419,4100 3419,4573 3440,4594 4240,4594 4285,4549 Y1.6 Y1.1 4119.65,4210 4065,4165 4065,3964 4184,3845 5578.39,3845 ; R3.1 5563.39,3860 5578.39,3845 ; SW14.2 5725.34,1500.34 5740,1500.34 6295,2055.34 6295,3219.28 6192.28,3322 ; R4.1 5707.28,3860 ; P1.1 6415,4293 6436,4272 6436,3901.63 CPU_RESET.1 6391.42,3628.39 6476.18,3543.62 6476.18,3466 6460,3449.82 6460,3382 6400,3322 6192.28,3322 ; 5578.39,3845 5692.28,3845 5707.28,3860 ; 5707.28,3860 5707.28,3807 6192.28,3322
  Bottom Layer w10: SW2.2 SW3.2 SW4.2 SW5.2 SW6.2 SW7.2 SW8.2 SW9.2 SW10.2 SW11.2 SW12.2 SW13.2 SW14.2 SW15.2 SW16.2 SW17.2
+5V: C2.2 C3.1 C5.2 C6.2 D1.1 U1.3 U2.1 U2.4 U3.3 | length 6065.8
  Top Layer w10: U1.3 1440,3769.84 1460,3789.84 1460,3924 1440,3944 1310,3944 1272,3906 1140,3906 1130,3916 1130,4264 1256,4390 1621,4390 1651,4360 1651,4235 1620,4204 U2.1 1650,3829.39 1665,3814.39 1665,3780 1690.41,3754.59 U2.4 1834,3754.59 1865.5,3786.08 U3.3 2263.7,3786.08 2274.29,3796.67 2274.29,3956.6 2137,3956.6 2102.4,3922 1920,3922 1896,3946 1896,3994 1920,4018 2595,4018 2635,4058 D1.1 2722,4570 2800,4492 3108.92,4492 3121.96,4505.04 C2.2 ; C6.2 5445.04,4800 5503.04,4858 5560,4858 5615.04,4802.96 C5.2
AN_0: DS17.3 U4.J17
AN_1: DS18.3 U4.J18
AN_2: DS19.3 U4.T9
AN_3: DS20.3 U4.J14
AN_4: DS21.3 U4.P14
AN_5: DS22.3 U4.T14
AN_6: DS23.3 U4.K2
AN_7: U4.U13
CPU_RESET: CPU_RESET.4 R37.1 | length 2391.3
  Top Layer w10: R37.1 4417.72,3682.28 v1(4423,3677)
  Bottom Layer w10: v1(4423,3677) 4550,3804 5639,3804 5861,4026 6481.63,4026 CPU_RESET.4
GND: C2.1 C3.2 C4.1 C5.1 C6.1 C7.1 C8.1 DS1.2 DS2.2 DS3.2 DS4.2 DS5.2 DS6.2 DS7.2 DS8.2 DS9.2 DS10.2 DS11.2 DS12.2 DS13.2 DS14.2 DS15.2 DS16.2 J1.2 J1.3 P1.2 R1.1 R21.2 R22.2 R23.2 R24.2 R25.2 R26.2 R27.2 R28.2 R29.2 R30.2 R31.2 R32.2 R33.2 R34.2 R35.2 R36.2 R37.2 U1.1 U2.2 U3.1 U4.A2 U4.A12 U4.B5 U4.B15 U4.C8 U4.C18 U4.D1 U4.D11 U4.E4 U4.E14 U4.F7 U4.F9 U4.F11 U4.F17 U4.G8 U4.G10 U4.G12 U4.H3 U4.H7 U4.H9 U4.H11 U4.H13 U4.J6 U4.J8 U4.J12 U4.J16 U4.K7 U4.K11 U4.L2 U4.L8 U4.L12 U4.M5 U4.M7 U4.M9 U4.M11 U4.M15 U4.N8 U4.N10 U4.N12 U4.N18 U4.P1 U4.R4 U4.R14 U4.T7 U4.T17 U4.U10 U4.V3 U4.V13 Y1.3 | length 24298.6
  Top Layer w10: U1.1 1280.16,3950.16 1330,4000 J1.2 J1.3 1570.16,3820 1598.17,3791.99 ; U2.2 1598.17,3791.99 ; DS2.2 1650,2330.44 1583,2397.44 1583,3780 1594.99,3791.99 1598.17,3791.99 ; U3.1 2117.99,3967.19 2127.4,3976.6 2294.29,3976.6 2294.29,3780.29 2267,3753 2267,3661 ; R21.2 R22.2 R23.2 R24.2 R25.2 ; DS4.2 2315,2805 2267,2853 2267,3661 ; DS6.2 3070,2205 R25.2 ; DS7.2 3315,1922.72 ; C4.1 3320,4014.57 3277,4057.57 3277,4310 3288.18,4321.18 ; C2.1 3370,4356.18 C3.2 3288.18,4321.18 ; Y1.3 4119.65,3977.35 4160,3937 4321,3937 5029.57,4645.57 ; R37.2 4480,3717.72 4526,3671.72 4526,2326 DS9.2 ; DS11.2 5120,2255 R34.2 ; R1.1 5275.59,4051.41 5029.57,4297.43 5029.57,4645.57 ; C6.1 5374.57,4677.57 5340,4643 5240,4643 ; R36.2 5462,1912.72 5452,1922.72 R35.2 R34.2 ; DS15.2 6495,3445.2 6496.18,3446.38 6496.18,3553.16 6456,3593.34 6456,4549 6415,4590 P1.2 6415,4648 5544.57,4660 5537.57,4667 ; 2267,3661 2927.18,4321.18 3288.18,4321.18 ; R25.2 R26.2 3315,1922.72 ; 3315,1922.72 R27.2 R28.2 R29.2 R30.2 R31.2 R32.2 R33.2 R34.2 ; 5029.57,4645.57 C8.1 5072.13,4747.57 5162,4747.57 C7.1 5204.57,4678.43 5240,4643 ; 5240,4643 5292,4591 5461.57,4591 5537.57,4667 ; 5537.57,4667 5544.57,4674 C5.1 5537.57,4667
  Bottom Layer w10: DS1.2 1398,2212 1567,2212 DS2.2 1725,2220 1905,2220 DS3.2 2025,2250 2270,2250 DS4.2 2388,2222 2572,2222 DS5.2 2705,2355 2920,2355 DS6.2 ; DS7.2 3391,2219 3569,2219 DS8.2 ; DS9.2 4575,2215 4750,2215 DS10.2 4895,2360 5095,2360 DS11.2 5228,2227 5427,2227 DS12.2 5569,2221 5751,2221 DS13.2 5870,2250 6115,2250 DS14.2 6242,2213 6413,2213 DS15.2 6600,2400 6720,2400 DS16.2
JTAG_TCK: P1.3 U4.E10
JTAG_TDI: P1.5 U4.E11
JTAG_TDO: P1.4 U4.E13
JTAG_TMS: P1.6 U4.E12
LED_0: R5.1 U4.H17
LED_1: R6.1 U4.K15
LED_2: R7.1 U4.J13
LED_3: R8.1 U4.N14
LED_4: R9.1 U4.R18
LED_5: R10.1 U4.V17
LED_6: R11.1 U4.U17
LED_7: R12.1 U4.U16
LED_8: R13.1 U4.V16
LED_9: R14.1 U4.T15
LED_10: R15.1 U4.U14
LED_11: R16.1 U4.T16
LED_12: R17.1 U4.V15
LED_13: R18.1 U4.V14
LED_14: R19.1 U4.V12
LED_15: R20.1 U4.V11
NetD1_2: D1.2 SW1.1 | length 903.6
  Top Layer w10: SW1.1 2251.39,4648 2722,4648 2800,4570 D1.2
NetDS1_1: DS1.1 R5.2 | length 1342.5
  Top Layer w10: DS1.1 1260,2340 1595,2340 1595,2300 1600,2295 1600,2270.47 1620,2250.47 1703.47,2250.47 2055,2602 2240,2602 2282.72,2644.72 R5.2
NetDS2_1: DS2.1 R6.2 | length 1373.5
  Top Layer w10: DS2.1 1576.93,2268.07 1576.93,2253.54 1620,2210.47 2399.53,2210.47 2467.72,2278.66 R6.2
NetDS3_1: DS3.1 R7.2 | length 1261.1
  Top Layer w10: DS3.1 1924.53,2250.47 2230.47,2250.47 2250.47,2230.47 2379.53,2230.47 2400,2250.94 2400,2679 2410,2689 2643.72,2689 2652.72,2680 R7.2
NetDS4_1: DS4.1 R8.2 | length 1134.2
  Top Layer w10: DS4.1 2259.53,2250.47 2340,2250.47 2359.53,2270 2359.53,2675.06 2400,2715.53 2662.47,2715.53 2749,2629 2826.72,2629 2837.72,2640 R8.2
NetDS5_1: DS5.1 R9.2 | length 648.3
  Top Layer w10: DS5.1 2849.72,2599.72 2987.43,2599.72 3027.72,2640 R9.2
NetDS6_1: DS6.1 R10.2 | length 476.4
  Top Layer w10: DS6.1 3142.28,2557.28 R10.2
NetDS7_1: DS7.1 R11.2 | length 478.3
  Top Layer w10: DS7.1 3215,2600 3277.72,2662.72 R11.2
NetDS8_1: DS8.1 R12.2 | length 374.9
  Top Layer w10: DS8.1 3545,2479 3562.28,2496.28 R12.2
NetDS9_1: DS9.1 R13.2 | length 993.1
  Top Layer w10: v1(3769.57,2295) R13.2
  Bottom Layer w10: v1(3769.57,2295) DS9.1
NetDS10_1: DS10.1 R14.2 | length 921.1
  Top Layer w10: R14.2 4007.28,2584 v1(4074.28,2517)
  Bottom Layer w10: v1(4074.28,2517) 4508,2517 DS10.1
NetDS11_1: DS11.1 R15.2 | length 1273.6
  Top Layer w10: R15.2 4227.28,2415.72 v1(4303,2340)
  Bottom Layer w10: v1(4303,2340) 4440,2340 4440,2250 4505,2185 4950,2185 DS11.1
NetDS12_1: DS12.1 R16.2 | length 1108.5
  Top Layer w10: v1(4465,2618) R16.2
  Bottom Layer w10: v1(4465,2618) 4546,2537 5153,2537 DS12.1
NetDS13_1: DS13.1 R17.2 | length 1223.3
  Top Layer w10: R17.2 4667.28,2640 4690.28,2617 v1(4918,2617)
  Bottom Layer w10: v1(4918,2617) 4923.1,2611.9 5408.1,2611.9 DS13.1
NetDS14_1: DS14.1 R18.2 | length 1369.5
  Top Layer w10: R18.2 4895,2685 4920,2710 4944,2710 v1(5002,2652)
  Bottom Layer w10: v1(5002,2652) 5703,2652 DS14.1
NetDS15_1: DS15.1 R19.2 | length 1493.4
  Top Layer w10: R19.2 v1(5125,2713)
  Bottom Layer w10: v1(5125,2713) 5977,2713 DS15.1
NetDS16_1: DS16.1 R20.2 | length 2066.3
  Top Layer w10: R20.2 5327.28,2740 v1(5358.28,2771)
  Bottom Layer w10: v1(5358.28,2771) 6437,2771 6870,2338 6870,2260 6850,2240 6780,2240 DS16.1
NetDS17_1: DS17.1 DS18.1 DS19.1 DS20.1 DS21.1 DS22.1 DS23.1 R42.2 | length 6442.2
  Top Layer w10: DS18.1 2637.09,3120 2572.09,3185 2375.13,3185 2302.13,3112 DS17.1 2302.13,2850 2317.13,2835 3572.05,2835 3617.05,2880 DS19.1 3617.05,3326.67 ; R42.2 3226,3717.72 3617.05,3326.67 ; DS20.1 3952.01,3120 ; DS21.1 4761.97,3120 ; DS22.1 5096.93,3088.93 ; DS23.1 5431.89,3149 5428.89,3152 5160,3152 5096.93,3088.93 ; 3617.05,3326.67 3683.72,3260 3892.01,3260 3952.01,3200 3952.01,3120 ; 3952.01,3120 4148.3,3316.29 4224.37,3316.29 4262.91,3354.83 4262.91,3680.91 4328.6,3746.6 4539.4,3746.6 4572,3714 4572,3309.97 4761.97,3120 ; 4761.97,3120 4812.97,3171 5058,3171 5096.93,3132.07 5096.93,3088.93
NetDS17_2: DS17.2 DS18.2 DS19.2 DS20.2 DS21.2 DS22.2 DS23.2 R41.2 | length 6839.3
  Top Layer w10: DS17.2 2361.18,2990 2376.18,2975 2681.14,2975 2696.14,2990 DS18.2 2696.14,3095.14 ; v1(2789,3188) 2696.14,3095.14 ; R41.2 3430,3740 3404,3766 3140,3766 3125,3751 3125,3431 2885,3191 2760,3191 2696.14,3127.14 2696.14,3095.14 ; v1(3676.1,3188) DS19.2 3676.1,2988.9 3690,2975 4000,2975 4011.06,2986.06 DS20.2 4011.06,3122.06 4044,3155 4180,3155 4343,2992 4343,2260 4353,2250 4575,2250 4862,2537 4958,2537 5077,2656 5077,2940 5042,2975 ; DS21.2 4821.02,2990 4836.02,2975 5042,2975 ; DS23.2 5490.95,2985.95 5480,2975 5397,2975 5397,3080 5366,3111 5180,3111 5155.98,3086.98 DS22.2 5155.98,2990 5140.98,2975 5042,2975
  Bottom Layer w10: v1(2789,3188) v1(3676.1,3188)
NetDS17_4: DS17.4 DS18.4 DS19.4 DS20.4 DS21.4 DS22.4 DS23.4 R40.2 | length 7591.4
  Top Layer w10: v1(2474,3115) 2479.29,3109.71 DS17.4 ; DS18.4 2814.25,3083.25 v1(2814.25,3115) 2846,3115 3154,3423 3154,3741 3156,3743 3271,3743 3364,3650 3490,3650 3557.72,3717.72 R40.2 ; DS19.4 v1(3794.21,3115) ; v1(4121,3115) 4129.17,3106.83 DS20.4 4129.17,2985.83 4140,2975 4180,2975 4195,2960 4195,2356 4339,2212 4842,2212 5233,2603 5680,2603 5720,2643 5720,2945 5640,2945 5609.06,2975.94 5609.06,2979.06 ; DS21.4 v1(4939.13,3115) ; DS22.4 5274.09,2995.91 5320,2950 5580,2950 5609.06,2979.06 ; DS23.4 5609.06,2979.06
  Bottom Layer w10: v1(2474,3115) v1(2814.25,3115) v1(3794.21,3115) v1(4121,3115) v1(4939.13,3115)
NetDS17_6: DS17.6 DS18.6 DS19.6 DS20.6 DS21.6 DS22.6 DS23.6 R39.2 | length 6214.2
  Top Layer w10: DS17.6 2538.35,3535.33 2506,3567.67 2506,3640 2532,3666 2572,3666 2594,3644 2594,3420 2614,3400 2863.31,3400 2873.31,3410 ; v1(2879,3309) 2873.31,3314.69 2873.31,3410 ; DS20.6 4188.23,3424 4164.23,3400 3863.27,3400 3853.27,3410 DS19.6 3853.27,3616 3844,3625.27 3844,3717.72 R39.2 3870,3736 3820,3786 2920,3786 2873.31,3739.31 DS18.6 2873.31,3410 ; v1(4987.19,3300) 4998.19,3311 DS21.6 ; v1(5106,3330) 5246,3330 5333.15,3417.15 DS22.6 5333.15,3510 5348.15,3525 5653.11,3525 5668.11,3510 DS23.6
  Bottom Layer w10: v1(2879,3309) 2919,3269 4956.19,3269 v1(4987.19,3300) 5017.19,3330 v1(5106,3330)
NetDS17_7: DS17.7 DS18.7 DS19.7 DS20.7 DS21.7 DS22.7 DS23.7 R38.2 | length 6098.9
  Top Layer w10: DS17.7 2479.29,3412 2487,3404.29 2574,3404.29 2574,3605 v1(2554,3625) ; v1(2814,3625) 2814.25,3624.75 DS18.7 ; DS19.7 3794.21,3399.79 3816,3378 4196.91,3378 4222.91,3404 4222.91,3525 4140,3525 DS20.7 v1(4129.17,3599.11) ; v1(4046,3705) 4058.72,3717.72 R38.2 4100,3730 4160,3790 4875.5,3790 ; DS21.7 4939.13,3725.87 4875.5,3790 ; DS22.7 5274.09,3518 5301.09,3545 5680,3545 5703,3522 ; DS23.7 5609.06,3408.94 5620,3398 5691,3398 5703,3410 5703,3522 ; 4875.5,3790 5453,3790 5703,3540 5703,3522
  Bottom Layer w10: v1(2554,3625) v1(2814,3625) 3966,3625 ; v1(4046,3705) 3966,3625 ; v1(4129.17,3599.11) 4103.29,3625 3966,3625
NetDS17_9: DS17.9 DS18.9 DS19.9 DS20.9 DS21.9 DS22.9 DS23.9 R43.2 | length 5739.1
  Top Layer w10: DS17.9 2361.18,3399.82 2492,3269 2908,3269 2919,3280 2919,3696.72 2940,3717.72 R43.2 2996,3717.72 v1(2996,3585) ; DS18.9 v1(2696.14,3562) ; DS19.9 v1(3676.1,3565) ; DS20.9 v1(4011.06,3565) v1(4011.06,3585) ; v1(4726,3692) 4821.02,3596.98 ; v1(4821.02,3692) 4821.02,3596.98 ; DS22.9 5155.98,3510 5141.14,3524.84 5062.24,3524.84 5046,3508.6 5046,3298.61 5007.39,3260 4968.43,3260 4821.02,3407.41 DS21.9 4821.02,3596.98 ; v1(5477.06,3383.94) 5490.94,3397.83 DS23.9
  Bottom Layer w10: v1(2696.14,3562) 2719.14,3585 v1(2996,3585) 3656.1,3585 v1(3676.1,3565) v1(4011.06,3565) ; v1(4011.06,3585) 4063.06,3533 4567,3533 v1(4726,3692) ; v1(4821.02,3692) 5169,3692 v1(5477.06,3383.94)
NetDS17_10: DS17.10 DS18.10 DS19.10 DS20.10 DS21.10 DS22.10 DS23.10 R44.2 | length 5781.5
  Top Layer w10: DS17.10 2302.13,3640 2351.13,3689 2615,3689 2637.09,3666.91 ; DS18.10 2637.09,3666.91 ; DS19.10 3617.05,3400 3659.05,3358 4226.91,3358 4242.91,3374 4242.91,3557.09 ; DS20.10 3952.01,3613 ; DS22.10 5096.93,3390.93 5066,3360 5066,3300 ; DS23.10 5431.89,3415.89 5306,3290 5076,3290 5066,3300 ; 2637.09,3666.91 2680,3717.72 R44.2 2740,3776 2773,3809 3903.01,3809 3952.01,3760 3952.01,3613 ; 3952.01,3613 3979.01,3640 4160,3640 4242.91,3557.09 ; 4242.91,3557.09 4242.91,3720 4289.91,3767 4557.97,3767 4761.97,3563 DS21.10 4761.97,3338 4884.97,3215 5031.86,3215 5066,3249.14 5066,3300
NetJ1_1: J1.1 SW1.2 | length 881.4
  Top Layer w10: J1.1@1330,4741.54 1570.16,4741.54 1570.16,4639.84 v1(1587,4623)
  Bottom Layer w10: v1(1587,4623) 2041.96,4623 SW1.2
NetL1_1: L1.1 U2.3 | length 5136.3
  Top Layer w10: U2.3 1630,3754.59 1630,3710 v1(1991,3349) ; v1(6374.57,3370) L1.1
  Bottom Layer w10: v1(1991,3349) 2900,3349 2919,3330 4957.19,3330 4997.19,3370 5141.66,3370 5175.63,3336.03 6340.6,3336.03 v1(6374.57,3370)
NetR1_2: R1.2 R2.1 U2.6 | length 3944.4
  Top Layer w10: v1(1695,3943) 1695,3829.39 U2.6 ; v1(5316,3943) 5311.02,3938.02 R1.2 R2.1
  Bottom Layer w10: v1(1695,3943) v1(5316,3943)
NetR3_2: R3.2 U4.P9
NetR4_2: R4.2 U4.P10
SEG_A: R38.1 U4.T10
SEG_B: R39.1 U4.R10
SEG_C: R40.1 U4.K16
SEG_D: R41.1 U4.K13
SEG_E: R42.1 U4.P15
SEG_F: R43.1 U4.T11
SEG_G: R44.1 U4.L18
SW_1: R22.1 SW3.3 U4.L16 | length 517.1
  Top Layer w10: SW3.3 2313.86,1887.28 R22.1
SW_3: R24.1 SW5.3 U4.R15 | length 477.1
  Top Layer w10: SW5.3 2813.86,1887.28 R24.1
SW_5: R26.1 SW7.3 U4.T18 | length 459
  Top Layer w10: SW7.3 3270,1848.43 3270,1877.28 3280,1887.28 R26.1
SW_7: R28.1 SW9.3 U4.R13 | length 432.8
  Top Layer w10: SW9.3 3760,1843.43 R28.1
SW_9: R30.1 SW11.3 U4.U8 | length 787.1
  Top Layer w10: R30.1 4399.72,1887.28 4718.57,1568.43 SW11.3
SW_11: R32.1 SW13.3 U4.T13 | length 887.1
  Top Layer w10: R32.1 4828,1887.28 5009.28,1706 5040,1706 5122,1624 5359.43,1624 SW13.3
SW_13: R34.1 SW15.3 U4.U12 | length 987.1
  Top Layer w10: R34.1 5182,1887.28 v1(5229,1840.28)
  Bottom Layer w10: v1(5229,1840.28) 5434.8,1634.49 5908.94,1634.49 SW15.3
SW_15: R36.1 SW17.3 U4.V10 | length 1097.9
  Top Layer w10: R36.1 5640,1877.28 v1(5842.28,1675)
  Bottom Layer w10: v1(5842.28,1675) 6428.43,1675 SW17.3
SYS_CLK: U4.E3 Y1.4
pads on no net: CPU_RESET.2 CPU_RESET.3 DS17.5 DS17.8 DS18.5 DS18.8 DS19.5 DS19.8 DS20.5 DS20.8 DS21.5 DS21.8 DS22.5 DS22.8 DS23.5 DS23.8 J1.MH1 J1.MH2 SW1.3 SW1.4 SW1.5 SW1.6 SW2.1 SW3.1 SW4.1 SW5.1 SW6.1 SW7.1 SW8.1 SW9.1 SW10.1 SW11.1 SW12.1 SW13.1 SW14.1 SW15.1 SW16.1 SW17.1 U2.5 U4.A1 U4.A3 U4.A4 U4.A5 U4.A6 U4.A8 U4.A9 U4.A10 U4.A11 U4.A13 U4.A14 U4.A15 U4.A16 U4.A18 U4.B1 U4.B2 U4.B3 U4.B4 U4.B6 U4.B7 U4.B8 U4.B9 U4.B10 U4.B11 U4.B12 U4.B13 U4.B14 U4.B16 U4.B17 U4.B18 U4.C1 U4.C2 U4.C4 U4.C5 U4.C6 U4.C7 U4.C9 U4.C10 U4.C11 U4.C12 U4.C14 U4.C15 U4.C16 U4.C17 U4.D2 U4.D3 U4.D4 U4.D5 U4.D7 U4.D8 U4.D9 U4.D10 U4.D12 U4.D13 U4.D14 U4.D15 U4.D17 U4.D18 U4.E1 U4.E2 U4.E5 U4.E6 U4.E7 U4.E8 U4.E9 U4.E15 U4.E16 U4.E17 U4.E18 U4.F1 U4.F3 U4.F4 U4.F5 U4.F6 U4.F13 U4.F14 U4.F15 U4.F16 U4.F18 U4.G1 U4.G2 U4.G3 U4.G4 U4.G6 U4.G13 U4.G14 U4.G16 U4.G17 U4.G18 U4.H1 U4.H2 U4.H4 U4.H5 U4.H14 U4.H15 U4.H16 U4.J2 U4.J3 U4.J4 U4.J5 U4.J9 U4.J10 U4.K1 U4.K3 U4.K5 U4.K6 U4.K9 U4.K10 U4.K17 U4.K18 U4.L1 U4.L3 U4.L4 U4.L5 U4.L6 U4.L9 U4.L10 U4.L13 U4.L14 U4.L15 U4.M1 U4.M2 U4.M3 U4.M4 U4.M6 U4.M14 U4.M16 U4.M17 U4.M18 U4.N1 U4.N2 U4.N4 U4.N5 U4.N6 U4.N15 U4.N16 U4.N17 U4.P2 U4.P3 U4.P4 U4.P5 U4.P7 U4.P11 U4.P12 U4.P13 U4.P17 U4.P18 U4.R1 U4.R2 U4.R3 U4.R5 U4.R6 U4.R7 U4.R8 U4.R9 U4.R11 U4.R12 U4.T1 U4.T3 U4.T4 U4.T5 U4.T6 U4.U1 U4.U2 U4.U3 U4.U4 U4.U6 U4.U7 U4.U9 U4.V1 U4.V2 U4.V4 U4.V5 U4.V6 U4.V7 U4.V9 Y1.2 Y1.5

## Polygon pours and split planes (outlines as drawn)
no net on Top Layer "NONET_L01_P000" (solid, pour order 0): 1010,4995 1005,4990 1005,1000 7000,1000 7005,1005 7005,5010

## Other copper
Top Layer:
  text "Operand B" at 2335,2879.99 h60
  text "Operand A" at 3650,2879.99 h60
  text "Hundreds" at 4590,2860 h60
  text "Tens" at 5145,2860 h60
  text "Ones" at 5475,2860 h60
  text "Operand A" at 2310,2084.99 h60
  text "Operand B" at 5575,2084.99 h60
  text "Operand A" at 2370,1109.99 h60
  text "Operand B" at 5320,1109.99 h60

## Text inside footprints (layer, text, board x,y; h text height)
U4: Top Overlay "REFDES" at 3656.75,4241.26 h50; Top Overlay "RefDes" at 3669.25,4241.26 h50; Top Overlay "18" at 4036.97,4586.76 h50 r90; Top Overlay "1" at 3501.54,4586.76 h50 r90; Top Overlay "V" at 3398.75,3973.54 h50; Top Overlay "A" at 3398.75,4508.98 h50; Top Assembly "RefDes2" at 3656.75,4241.26 h50; Top Assembly "18" at 4036.97,4586.76 h50 r90; Top Assembly "1" at 3501.54,4586.76 h50 r90; Top Assembly "V" at 3398.75,3973.54 h50; Top Assembly "A" at 3398.75,4508.98 h50; Bottom Overlay "18" at 3986.97,4586.76 h50 r270; Bottom Overlay "1" at 3451.54,4586.76 h50 r270; Bottom Overlay "V" at 3423.75,3973.54 h50; Bottom Overlay "A" at 3423.75,4508.98 h50